# Altium PCB toasterBigBoardVERSION2.PcbDoc
Units mil, origin at the board's own origin, x right, y up, seen from the top; angles counter-clockwise.
Board outline 12550 x 9550 mil, 3 copper layers (Top Layer, GND Plane, Bottom Layer), stack 19.217 mil thick; 23 components, 6 nets, 49 pads, 6 vias.
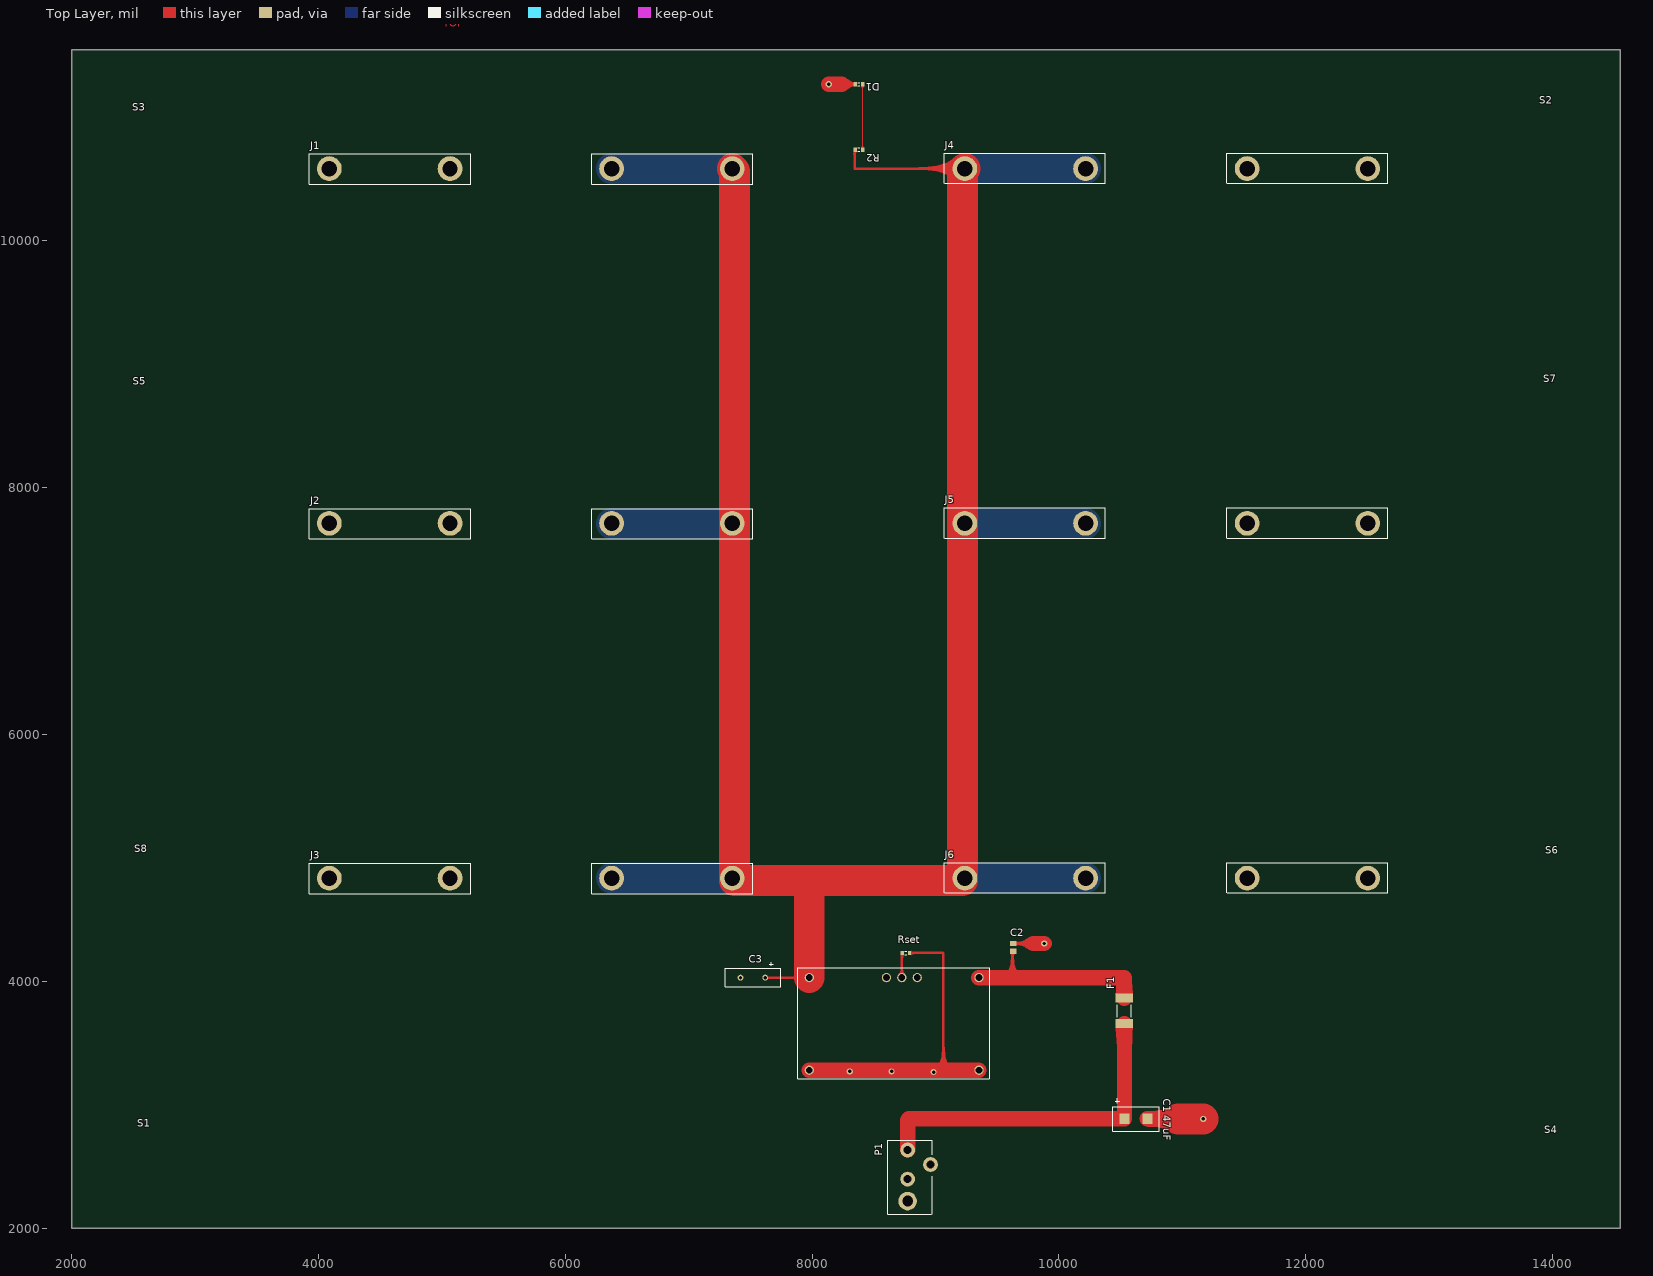
[diagram p0: Top Layer view]
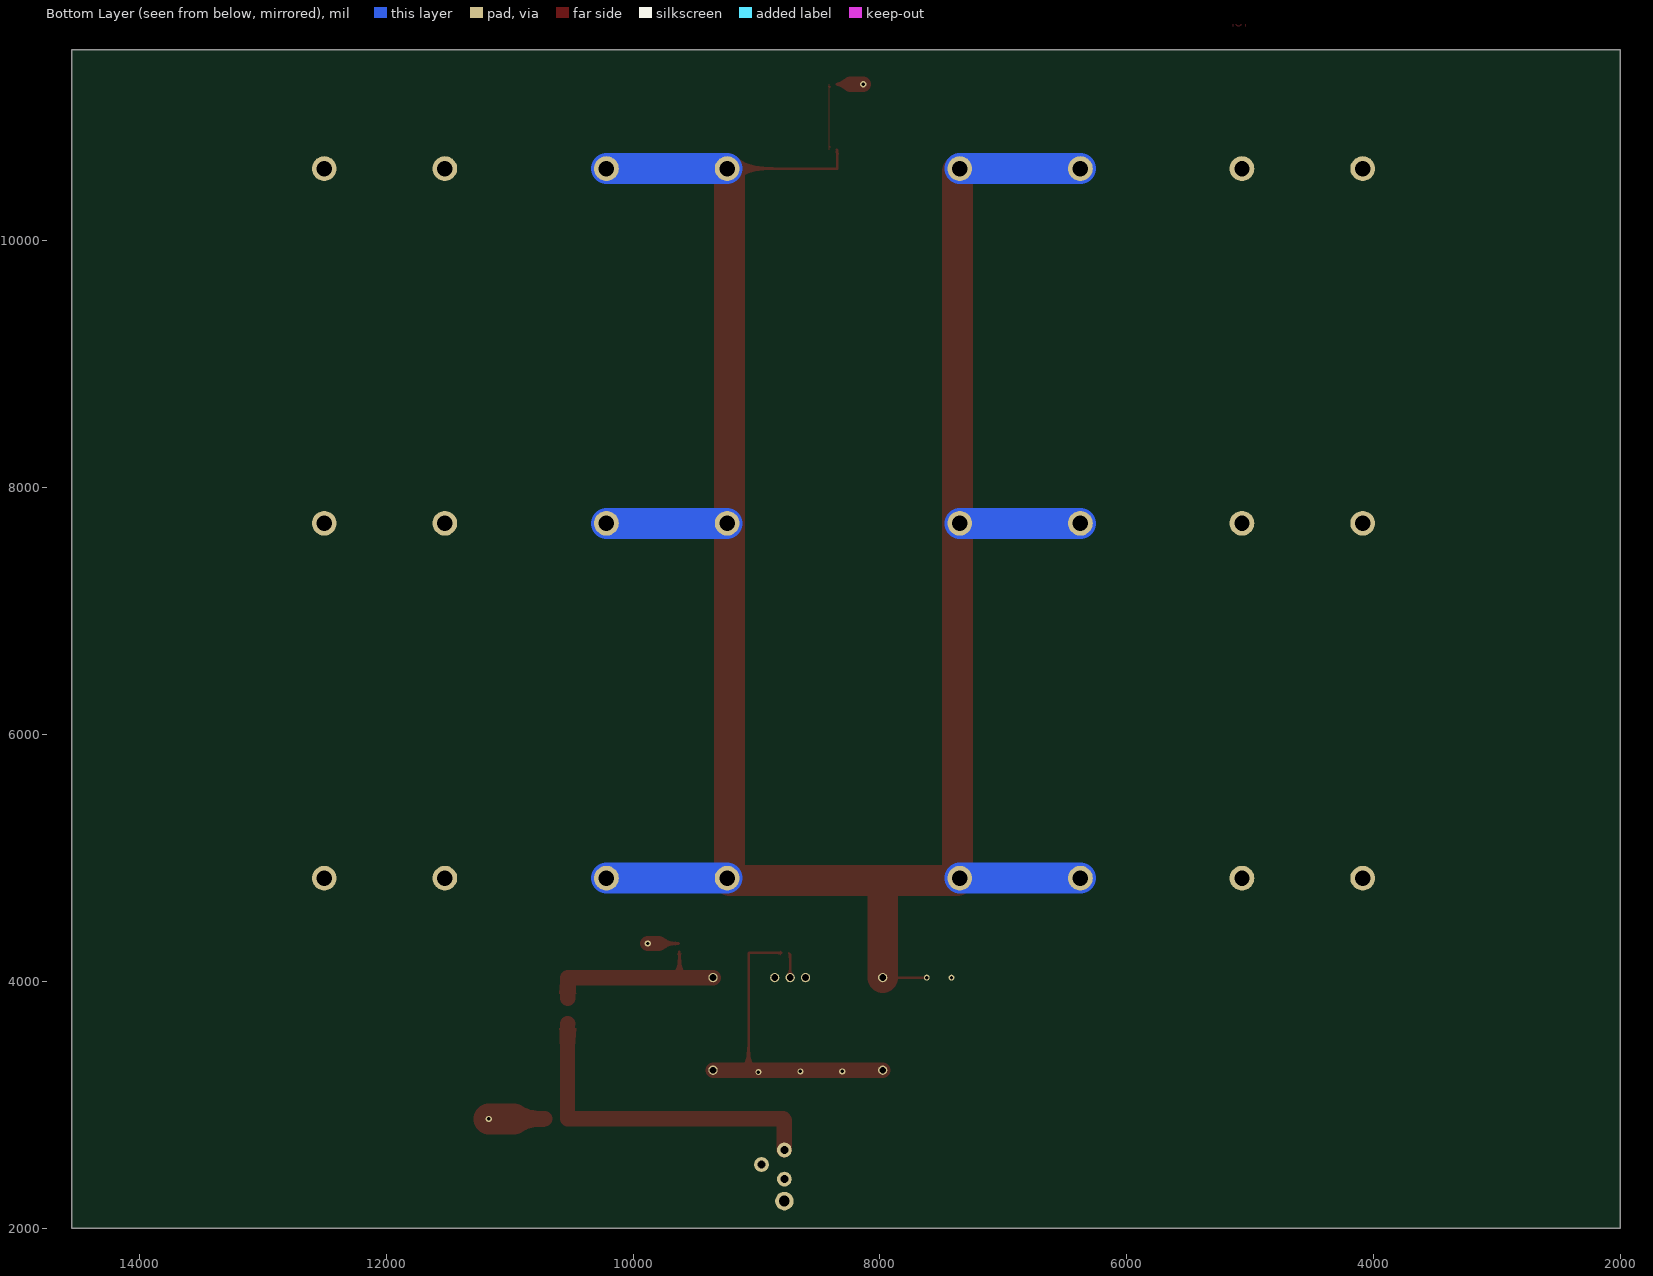
[diagram p1: Bottom Layer view, seen from below]
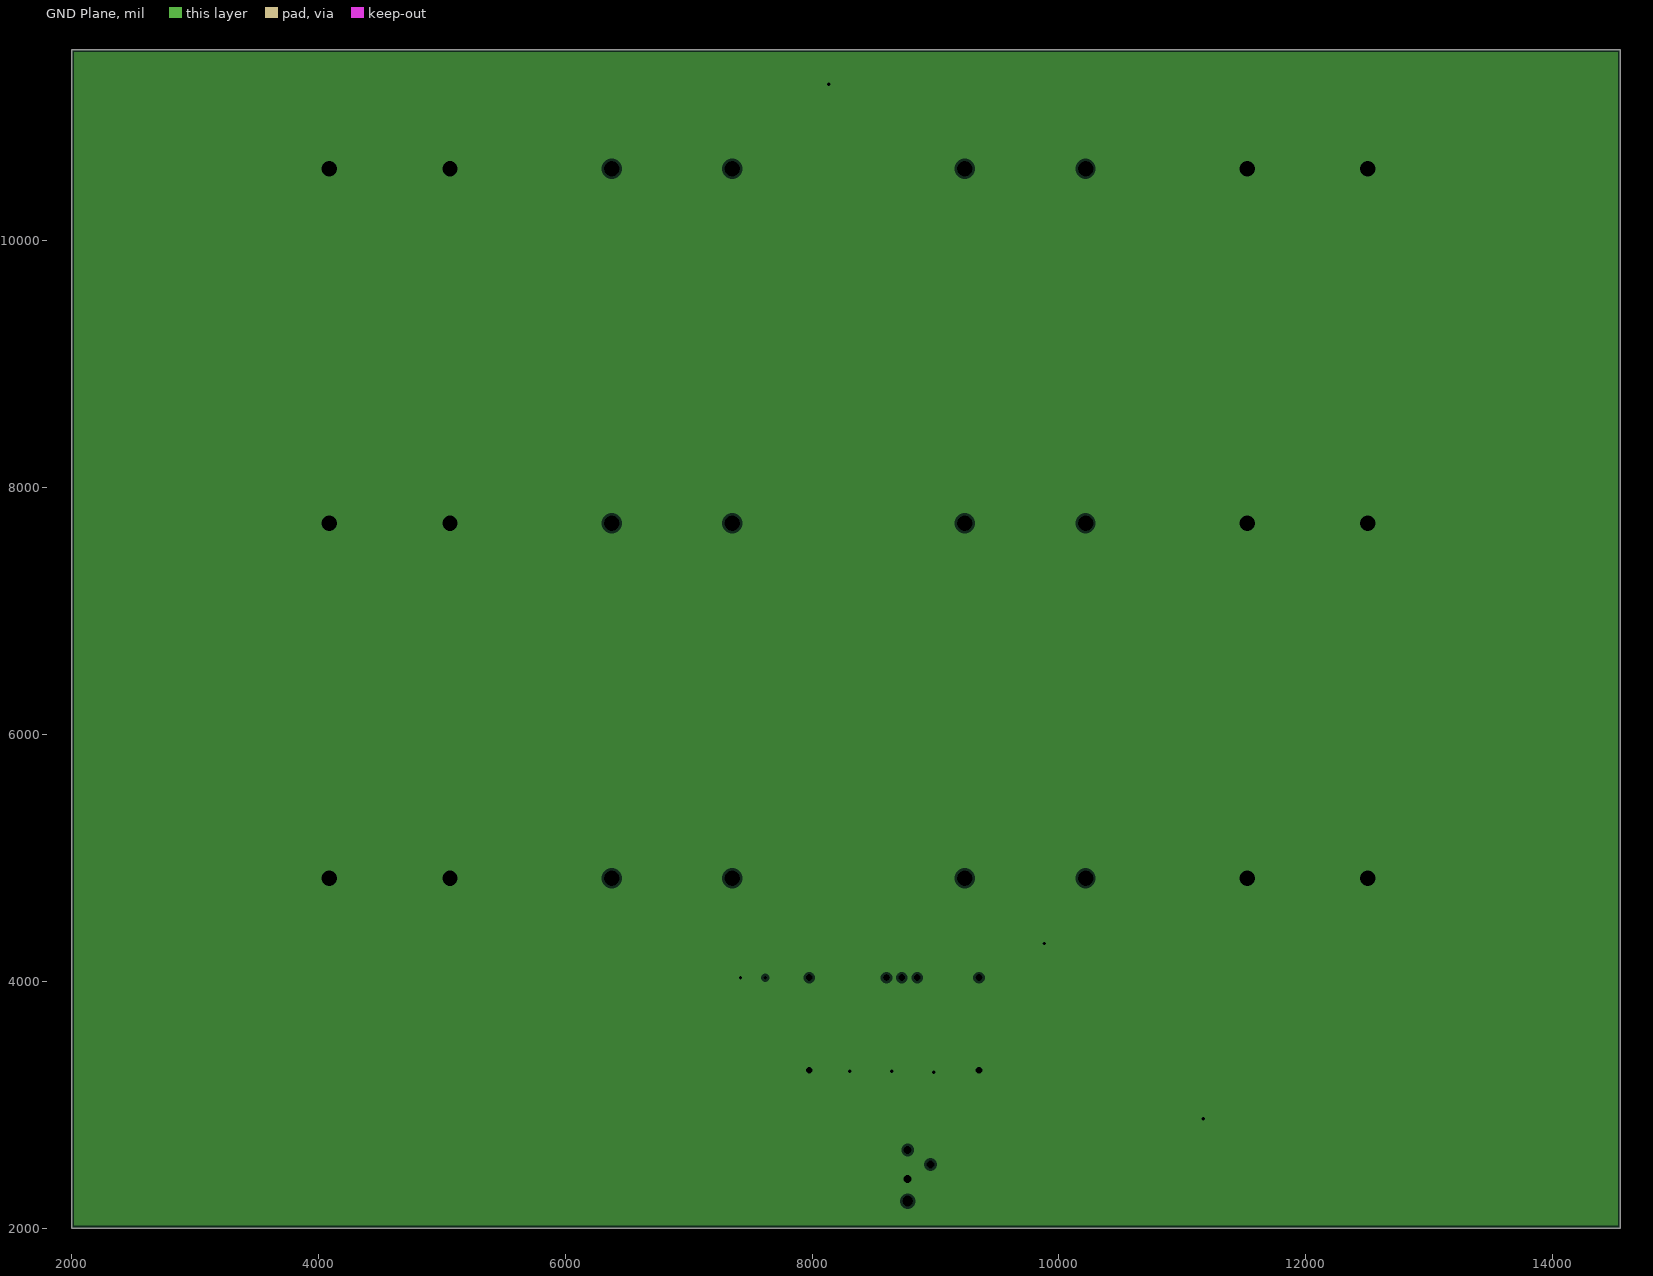
[diagram p2: GND Plane, clearances drawn from the general rule]

## Layer stack, top to bottom
Top Solder: solder mask 0.4, Solder Resist, Dk 3.5
Top Layer: signal copper 1.4
Dielectric1: core 10, FR-4, Dk 4.2
GND Plane: plane copper 1.417
Dielectric 2: prepreg 5, Dk 4.2
Bottom Layer: signal copper 1.4
Bottom Solder: solder mask 0.4, Solder Resist, Dk 3.5

## Board outline
2000,2000 14550,2000 14550,11550 2000,11550

## Design rules (kind name [scope] priority, off if disabled: settings)
Clearance [All] p1: gap=10
HoleSize [All] p1: absolutevalues=TRUE maxlimit=500 minlimit=1 maxpercent=80.000 minpercent=20.000
PlaneClearance [All] p1: clearance=20
PlaneConnect PlaneConnect_1 [(InNet('GND') AND InComponent('P1'))] p1: planeconnectstyle=Relief reliefexpansion=20 reliefentries=4 reliefconductorwidth=10 reliefairgap=10
PlaneConnect [All] p2: planeconnectstyle=Direct reliefexpansion=20 reliefentries=4 reliefconductorwidth=10 reliefairgap=10
PolygonConnect [All] p1: connectstyle=Relief reliefconductorwidth=10 reliefentries=4 polygonreliefangle="90 Angle" airgapwidth=10
RoutingLayers RoutingLayers_1 [All] p1: top layer_v5=TRUE bottom layer_v5=TRUE
RoutingLayers [OnLayer('GND Plane')] p2: top layer_v5=TRUE bottom layer_v5=TRUE
RoutingVias [All] p1: holewidth=28 width=50 viastyle="Through Hole" minholewidth=28 minwidth=50 maxholewidth=28 maxwidth=50
SMDNeckDown [All] p1 off: percent=50.000
SilkToSolderMaskClearance SilkscreenOverComponentPads [IsPad] p1: minsilkscreentomaskgap=3 clearancetoexposedcopper=TRUE
SolderMaskExpansion [All] p1: expansion=4
Width "Schematic Width Constraint_1" [InNet('Net_6')] p1: maxlimit=250 minlimit=20 preferedwidth=125 minimp=50.000000 maximp=50.000000 favimp=50.000000
Width "Schematic Width Constraint" [InNet('GND')] p2: maxlimit=250 minlimit=20 preferedwidth=125 minimp=50.000000 maximp=50.000000 favimp=50.000000
Width "Schematic Width Constraint_6" [InNet('Net_2')] p3: maxlimit=250 minlimit=20 preferedwidth=125 minimp=50.000000 maximp=50.000000 favimp=50.000000
Width "Schematic Width Constraint_4" [InNet('12V')] p4: maxlimit=250 minlimit=20 preferedwidth=125 minimp=50.000000 maximp=50.000000 favimp=50.000000
Width [All] p5: maxlimit=60 minlimit=10 preferedwidth=10 minimp=50.000000 maximp=50.000000 favimp=50.000000
25 further rules are at their usual default settings.

## Components (designator, comment, footprint, x,y, rotation, side; value= is the part's Value field where it differs from the comment)
"C1 47uF" "CapTant6032-28" CAPTANT6032-28 10625,2885 r0 top
C2 "CIN" CAPC2012L 9630,4275 r270 top
C3 "COUT" "RAD-0.2 - POLARIZED" 7520,4030 r0 top
D1 "LED Power 1" SURFACEMOUNT(603) 8380,11270 r180 top
F1 "PTC" J1-1812 10530,3760 r90 top
J1 "ToasterChargerProng" TOASTERCHARGERPRONG 5720.65,10586.5 r180 top
J2 "ToasterChargerProng" TOASTERCHARGERPRONG 5720.65,7711.5 r180 top
J3 "ToasterChargerProng" TOASTERCHARGERPRONG 5720.65,4836.5 r180 top
J4 "ToasterChargerProng" TOASTERCHARGERPRONG 10870.9,10586.5 r0 top
J5 "ToasterChargerProng" TOASTERCHARGERPRONG 10870.9,7711.5 r0 top
J6 "ToasterChargerProng" TOASTERCHARGERPRONG 10870.9,4836.5 r0 top
P1 "PJ-059A" PJ-059A 8782,2421 r90 top
R2 "Resistor" J1-0603 8380,10740 r0 top
Rset "Resistor" J1-0603 8760,4230 r0 top
S1 "ToasterChargerZiptie" TOASTERCHARGERZIPTIEREVISED2 2562.5,2625 r0 top
S2 "ToasterChargerZiptie" TOASTERCHARGERZIPTIEREVISED2 13987.5,10925 r0 top
S3 "ToasterChargerZiptie" TOASTERCHARGERZIPTIEREVISED2 2562.5,10925 r0 top
S4 "ToasterChargerZiptie" TOASTERCHARGERZIPTIEREVISED2 13987.5,2625 r0 top
S5 "ToasterChargerZiptie" TOASTERCHARGERZIPTIEREVISED2 2562.5,8675 r180 top
S6 "ToasterChargerZiptie" TOASTERCHARGERZIPTIEREVISED2 13987.5,4875 r180 top
S7 "ToasterChargerZiptie" TOASTERCHARGERZIPTIEREVISED2 13987.5,8675 r180 top
S8 "ToasterChargerZiptie" TOASTERCHARGERZIPTIEREVISED2 2562.5,4875 r180 top
? "PTN78020WAH" PTN78020WAH 8665,3655 r180 top

## Footprints (in the part's own frame and the unit in brackets; to place one, negate y for a bottom-side part, rotate by r counter-clockwise, add the part's x,y. Pads: shape width x height; smd on the part's side, far side on the other; paste and mask are expansions set on the pad)
CAPC2012L [mm] "Chip Capacitor, Body 2.0x1.3mm, IPC High Density"
  rect 1.1x1.4 smd: 1(-0.8,0) 2(0.8,0)
  body extent -1.1,-0.72 1.1,0.72, height 1.4
CAPTANT6032-28 [mm] "Standard capacitor sized at a C Case (6.0 x 3.2 mm)"
  rect 1.99x2.13 smd: 1(-2.36,0) 2(2.36,0)
  silkscreen extent -4.79,-2.5 4.79,4.22, body extent -2.9,-1.55 2.9,1.5, height 2.79
J1-0603 [mm] "Chip Resistor, Body 1.6x0.8mm, IPC High Density"
  rect 0.7x0.9 smd: 1(-0.75,0) 2(0.75,0)
  silkscreen extent -0.2,-0.35 0.2,0.35, body extent -0.85,-0.48 0.85,0.48, height 0.9
J1-1812 [mm] "Standard surface mount chip - 45 x 32 mm"
  rect 1.85x3.6 smd: 1(-2.615,0) 2(2.615,0)
  silkscreen extent -1.3,-1.4 1.3,1.4
PJ-059A [mil] "DC power jack, rated at 16 V. For use in Toaster Charger."
  round 120 hole 63: 1(212,7.5) 2(-24,7.5) 3(94,-177.5)
  round 150 hole 87: 4(-202,7.5)
  silkscreen extent -310,-190 291,170, body extent -305,-185 285,165, height 433
PTN78020WAH [mil] "T.I. DC/DC Converter (PTH)"
  round 75 hole 55: 1(-687.5,375) 2(-687.5,-375) 3(-187.5,-375) 4(-62.5,-375) 5(62.5,-375) 6(687.5,-375) 7(687.5,375)
  silkscreen extent -775,-455 780,445, body extent -770,-445 775,450, height 350
"RAD-0.2 - POLARIZED" [mm] "Polarized Radial Cap, Thru-Hole; 2 Leads; 0.2 in Pin Spacing."
  round 1.2 hole 0.7: 1(-2.54,0) 2(2.54,0)
  silkscreen extent -5.71,-1.91 5.71,3.17, body extent -5.07,-5.08 5.08,5.08, height 16
SURFACEMOUNT(603) [mm]
  rect 0.7x0.9 smd: 1(-0.75,0) 2(0.75,0)
  silkscreen extent -0.2,-0.35 0.2,0.35, body extent -0.85,-0.48 0.85,0.48, height 0.9
TOASTERCHARGERPRONG [mil] "PCB footprint for toaster Charger clips"
  round 200 hole 125: 1(-1632.6,0) 2(-654.6,0) 3(654.6,0) 4(1632.6,0)
  silkscreen extent -1799,-120 1794,126
TOASTERCHARGERZIPTIEREVISED2 [mil] "2nd revision for Ziptie for Toaster charger, now a cut on the mechanical layer."

## Part data
"C1 47uF": "Polarized Tantalum Capacitor for use in Toaster Charger"
C2 C3: library part Cap, "Capacitor"
D1: library part LED
F1: library part PTC_FUSE, "Fuse"
J1 J2 J3 J4 J5 J6: "Charger Prong Footprint for Toaster Charger"
S1 S2 S3 S4 S5 S6 S7 S8: "Slot for Ziptie connection between PCB and Toaster Charger"
?: "T.I. DC-DC Converter"

## Via types
v1: diameter 50, hole 28, Top Layer to Bottom Layer, 6 vias

## Nets (pads, with @x,y where several pads share a name; then routed paths per layer and width w, separated by ;. In a path a pad name is that pad's centre, name@x,y a point inside that pad or via, vN(x,y) a via of type N, cw(c..) or ccw(c..) an arc to the next point about the centre after c; other vN are vias at no path point)
12V: "C1 47uF.1" F1.1 P1.1 | length 2776.9
  Top Layer w125: P1.1 8774.5,2875.5 8784,2885 10532.09,2885 10532.09,3654.96 F1.1
GND: "C1 47uF.2" ?.1 ?.7 C2.1 C3.1 D1.2 J1.3 J1.4 J2.3 J2.4 J3.3 J3.4 J4.3 J4.4 J5.3 J5.4 J6.3 J6.4 P1.2 Rset.2 | length 3506.6
  Top Layer w20: 8240,11270 D1.2 ; Rset.2@8799.53,4230 9060,4230 9065,4225 9065,3280 ; C2.1 9791.49,4306.49
  Top Layer w125: ?.7 ?.1 ; v1(8135,11270) 8240,11270 ; 9791.49,4306.49 v1(9881.49,4306.49) ; 10717.91,2885 10965,2885
  Top Layer w250: 10965,2885 v1(11170,2885)
  other v1: 8985,3265 8305,3270 8645,3270
Net_2: ?.2 C2.2 F1.2 | length 1553.1
  Top Layer w20: 9625,4030 C2.2@9625,4238.51
  Top Layer w125: ?.2 9625,4030 10530,4030 F1.2
Net_4: ?.4 Rset.1 | length 205.4
  Top Layer w10: Rset.1@8727.5,4217.03 Rset.1@8740.47,4230
  Top Layer w20: ?.4 Rset.1@8727.5,4217.03
Net_6: ?.6 C3.2 J1.1 J1.2 J2.1 J2.2 J3.1 J3.2 J4.1 J4.2 J5.1 J5.2 J6.1 J6.2 R2.1 | length 21462.9
  Top Layer w20: C3.2 ?.6 ; R2.1 8345,10734.53 8345,10586.5 J4.1
  Top Layer w250: J1.1 7372.25,10567.5 7372.25,4817.5 7977.5,4817.5 ; ?.6 7977.5,4817.5 ; J4.1 9219.3,10567.5 9219.3,4817.5 7977.5,4817.5
  Bottom Layer w250: J3.2 J3.1 ; J2.2 J2.1 ; J1.2 J1.1 ; J6.1 J6.2 ; J5.1 J5.2 ; J4.1 J4.2
NetD1_1: D1.1 R2.2 | length 530
  Top Layer w10: R2.2 D1.1
pads on no net: ?.3 ?.5 P1.3 P1.4

## Polygon pours and split planes (outlines as drawn)
GND on GND Plane (split plane): 14529.9,2020.1 2020.1,2020.1 2020.1,11529.9 14529.9,11529.9

## Other copper
Top Layer:
  text "TOP" at 5010,11735 h60